# Altium PCB AfternoonCape_RevA1_TImux.PcbDoc
Units mil, origin at the board's own origin, x right, y up, seen from the top; angles counter-clockwise.
Board outline 3400 x 2150.01 mil, 2 copper layers (Top Layer, Bottom Layer); 32 components, 107 nets, 339 pads, 63 vias.
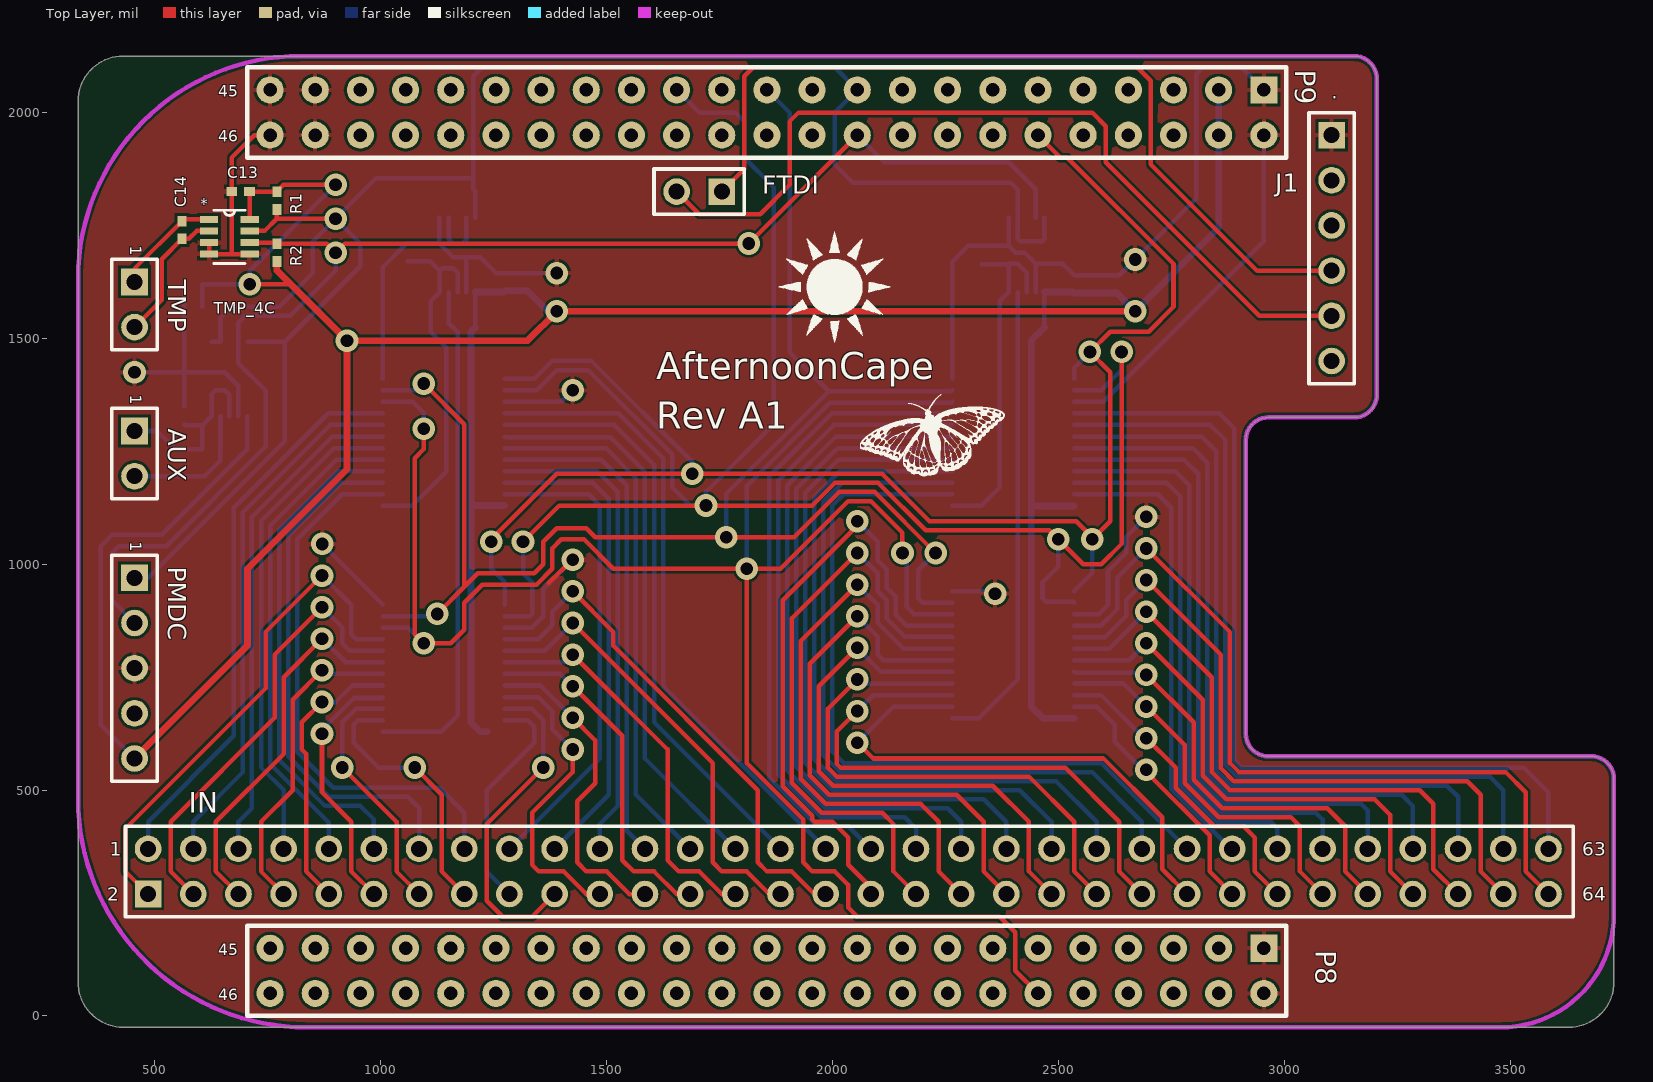
[diagram p0: Top Layer view]
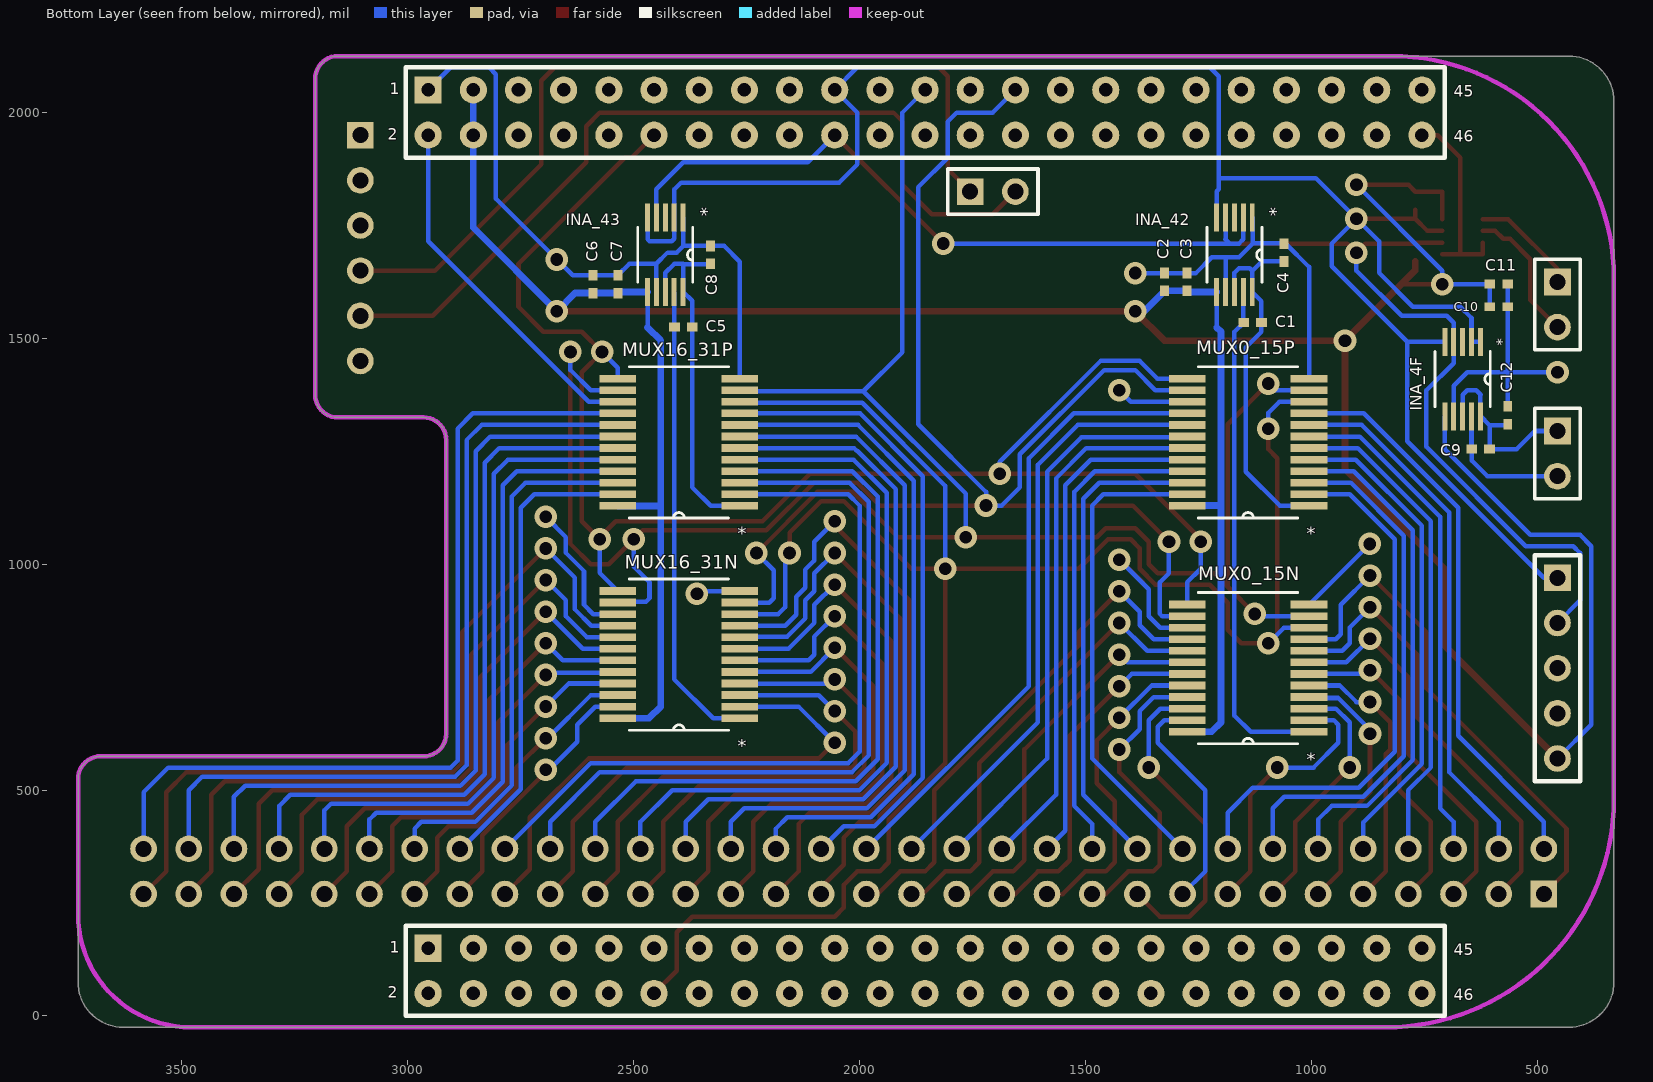
[diagram p1: Bottom Layer view, seen from below]

## Layer stack, top to bottom
Top Layer: signal copper 1.4
Dielectric: dielectric 12.6, FR-4, Dk 4.8
Bottom Layer: signal copper 1.4

## Board outline
3155,2125 3154.99,2125.01 822.5,2125.01 430,2125.01 ccw(c430,2025.01) 330,2025.01 330,480 330,75 ccw(c430,75) 430,-25 845,-25 3450,-25 3630,-25 ccw(c3630,75) 3730,75 3730,285 3730,525 ccw(c3680,525) 3680,575 2980,575 2965,575 cw(c2965,625) 2915,625 2915,1275 cw(c2965,1275) 2965,1325 2980,1325 3155,1325 ccw(c3155,1375) 3205,1375 3205,2075 ccw(c3155,2075) 3155,2125 3150,2125

## Design rules (kind name [scope] priority, off if disabled: settings)
Clearance [All] p1: gap=6
MinimumSolderMaskSliver [All] p1: minsoldermaskwidth=0
PolygonConnect [All] p1: connectstyle=Relief reliefconductorwidth=10 reliefentries=4 polygonreliefangle="90 Angle"
RoomDefinition AfternoonCape_RevA1_TImux [InComponentClass('AfternoonCape_RevA1_TImux')] p1: confinementstyle=ConfineIn formatcopy=TRUE lockcomponents=FALSE outline -70,-230 4170,-230 4170,2305 -70,2305
RoutingVias [All] p1: holewidth=28 width=50 viastyle="Through Hole" minholewidth=28 minwidth=50 maxholewidth=28 maxwidth=50
SilkscreenOverComponentPads [All] p1: minsilkscreentomaskgap=10
SolderMaskExpansion [All] p1: expansion=4
Width [All] p1: maxlimit=20 minlimit=10 preferedwidth=10
26 further rules are at their usual default settings.

## Components (designator, comment, footprint, x,y, rotation, side; value= is the part's Value field where it differs from the comment)
AUX "Header 2" HDR1X2 455,1295 r270 top
C1 "Cap Semi" 0402 1130,1535 r180 bottom
C2 "Cap Semi" 0402 1325,1625 r270 bottom
C3 "Cap Semi" 0402 1275,1625 r270 bottom
C4 "Cap Semi" 0402 1060,1690 r270 bottom
C5 "Cap Semi" 0402 2390,1525 r180 bottom
C6 "Cap Semi" 0402 2590,1620 r270 bottom
C7 "Cap Semi" 0402 2535,1620 r270 bottom
C8 "Cap Semi" 0402 2330,1685 r270 bottom
C9 "Cap Semi" 0402 625,1255 r180 bottom
C10 "Cap Semi" 0402 585,1570 r0 bottom
C11 "Cap Semi" 0402 585,1620 r0 bottom
C12 "Cap Semi" 0402 565,1330 r270 bottom
C13 "Cap Semi" 0402 690,1825 r0 top
C14 "Cap Semi" 0402 560,1740 r90 top
FTDI "Header 2" HDR1X2 1755,1825 r180 top
IN "Header 32x2" HDR2X32 485,270 r0 top
INA_4F "INA226" DGS10 665,1410 r270 bottom
INA_42 "INA226" DGS10 1170,1685 r270 bottom
INA_43 "INA226" DGS10 2430,1685 r270 bottom
J1 "Header 6" HDR1X6 3105,1950 r270 top
MUX0_15N "CD74HC4067_DB_24" DB24 1140,770 r0 bottom
MUX0_15P "CD74HC4067_DB_24" DB24 1140,1270 r0 bottom
MUX16_31N "CD74HC4067_DB_24" DB24 2400,800 r0 bottom
MUX16_31P "CD74HC4067_DB_24" DB24 2400,1270 r0 bottom
P8 "FEMALE HEADER 2x23" HEADER23X2 1855,100 r180 top
P9 "FEMALE HEADER 2x23" HEADER23X2 1855,2000 r180 top
PMDC "Header 5" HDR1X5 455,970 r270 top
R1 "Res3" 0402 770,1805 r90 top
R2 "Res3" 0402 770,1690 r270 top
TMP "Header 2" HDR1X2 455,1625 r270 top
TMP_4C "TMP441_DCN_8" DCN8-L 665,1725 r0 top

## Footprints (in the part's own frame and the unit in brackets; to place one, negate y for a bottom-side part, rotate by r counter-clockwise, add the part's x,y. Pads: shape width x height; smd on the part's side, far side on the other; paste and mask are expansions set on the pad)
0402 [mm] "Chip Capacitor, Body 1.0x0.5mm, IPC High Density"
  rect 0.6x0.5 smd: 1(-0.5,0) 2(0.5,0)
  body extent -0.55,-0.3 0.55,0.3, height 1.3
DB24 [mil]
  rect 81x17 smd: 1(-135,140.75) 2(-135,115.16) 3(-135,89.57) 4(-135,63.98) 5(-135,38.39) 6(-135,12.8) 7(-135,-12.8) 8(-135,-38.39) 9(-135,-63.98) 10(-135,-89.57) 11(-135,-115.16) 12(-135,-140.75) 13(135,-140.75) 14(135,-115.16) 15(135,-89.57) 16(135,-63.98) 17(135,-38.39) 18(135,-12.8) 19(135,12.8) 20(135,38.39) 21(135,63.98) 22(135,89.57) 23(135,115.16) 24(135,140.75)
  silkscreen extent -110,-168 110,168
DCN8-L [mil]
  rect 40x15 smd: 1(-45,38.39) 2(-45,12.8) 3(-45,-12.8) 4(-45,-38.39) 5(45,-38.39) 6(45,-12.8) 7(45,12.8) 8(45,38.39)
  silkscreen extent -34,-59 35,59
DGS10 [mil]
  rect 62x11 smd: 1(-82.5,39.37) 2(-82.5,19.68) 3(-82.5,0) 4(-82.5,-19.68) 5(-82.5,-39.37) 6(82.5,-39.37) 7(82.5,-19.68) 8(82.5,0) 9(82.5,19.68) 10(82.5,39.37)
  silkscreen extent -61,-61 61,61, body extent -96,-59 97,59, height 37
HDR1X2 [mm] "Connector; Header; 2 Position"
  rect 1.5x1.5 hole 0.9: 1(0,0)
  round 1.5 hole 0.9: 2(2.54,0)
  silkscreen extent -1.27,-1.27 3.81,1.27
HDR1X5 [mm] "Connector; Header; 5 Position"
  rect 1.5x1.5 hole 0.9: 1(0,0)
  round 1.5 hole 0.9: 2(2.54,0) 3(5.08,0) 4(7.62,0) 5(10.16,0)
  silkscreen extent -1.27,-1.27 11.43,1.27
HDR1X6 [mm] "Connector; Header; 6 Position"
  rect 1.5x1.5 hole 0.9: 1(0,0)
  round 1.5 hole 0.9: 2(2.54,0) 3(5.08,0) 4(7.62,0) 5(10.16,0) 6(12.7,0)
  silkscreen extent -1.27,-1.27 13.97,1.27
HDR2X32 [mm]
  rect 1.5x1.5 hole 0.9: 1(0,0)
  round 1.5 hole 0.9: 2(0,2.54) 3(2.54,0) 4(2.54,2.54) 5(5.08,0) 6(5.08,2.54) 7(7.62,0) 8(7.62,2.54) 9(10.16,0) 10(10.16,2.54) 11(12.7,0) 12(12.7,2.54) 13(15.24,0) 14(15.24,2.54) 15(17.78,0) 16(17.78,2.54) 17(20.32,0) 18(20.32,2.54) 19(22.86,0) 20(22.86,2.54) 21(25.4,0) 22(25.4,2.54) 23(27.94,0) 24(27.94,2.54) 25(30.48,0) 26(30.48,2.54) 27(33.02,0) 28(33.02,2.54) 29(35.56,0) 30(35.56,2.54) 31(38.1,0) 32(38.1,2.54) 33(40.64,0) 34(40.64,2.54) 35(43.18,0) 36(43.18,2.54) 37(45.72,0) 38(45.72,2.54) 39(48.26,0) 40(48.26,2.54) 41(50.8,0) 42(50.8,2.54) 43(53.34,0) 44(53.34,2.54) 45(55.88,0) 46(55.88,2.54) 47(58.42,0) 48(58.42,2.54) 49(60.96,0) 50(60.96,2.54) 51(63.5,0) 52(63.5,2.54) 53(66.04,0) 54(66.04,2.54) 55(68.58,0) 56(68.58,2.54) 57(71.12,0) 58(71.12,2.54) 59(73.66,0) 60(73.66,2.54) 61(76.2,0) 62(76.2,2.54) 63(78.74,0) 64(78.74,2.54)
  silkscreen extent -1.27,-1.27 80.14,3.81
HEADER23X2 [mil] "HEADER23X2"
  rect 60x60 hole 30 mask+2: 1(-1100,-50)
  round 60 hole 30 mask+2: 2(-1100,50) 3(-1000,-50) 4(-1000,50) 5(-900,-50) 6(-900,50) 7(-800,-50) 8(-800,50) 9(-700,-50) 10(-700,50) 11(-600,-50) 12(-600,50) 13(-500,-50) 14(-500,50) 15(-400,-50) 16(-400,50) 17(-300,-50) 18(-300,50) 19(-200,-50) 20(-200,50) 21(-100,-50) 22(-100,50) 23(0,-50) 24(0,50) 25(100,-50) 26(100,50) 27(200,-50) 28(200,50) 29(300,-50) 30(300,50) 31(400,-50) 32(400,50) 33(500,-50) 34(500,50) 35(600,-50) 36(600,50) 37(700,-50) 38(700,50) 39(800,-50) 40(800,50) 41(900,-50) 42(900,50) 43(1000,-50) 44(1000,50) 45(1100,-50) 46(1100,50)
  silkscreen extent -1150,-100 1150,100

## Part data
AUX FTDI TMP: "Header, 2-Pin"
C1 C2 C3 C4 C5 C6 C7 C8 C9 C10 C11 C12 C13 C14: "Capacitor (Semiconductor SIM Model)"
IN: "Header, 32-Pin, Dual row"
J1: "6-pin female header, long legs for FTDI-USB cable"
MUX0_15N MUX0_15P MUX16_31N MUX16_31P TMP_4C: "Imported"
P8 P9: library part HDR_46_F_2_0.1_0.1, "CONN HEADER FMAL 46PS.1\" DL GOLD"
PMDC: "Header, 5-Pin"
R1 R2: "Resistor"

## Via types
v1: diameter 50, hole 28, Top Layer to Bottom Layer, 63 vias

## Nets (pads, with @x,y where several pads share a name; then routed paths per layer and width w, separated by ;. In a path a pad name is that pad's centre, name@x,y a point inside that pad or via, vN(x,y) a via of type N, cw(c..) or ccw(c..) an arc to the next point about the centre after c; other vN are vias at no path point)
AIN0: P9.39
AIN1: P9.40
AIN2: P9.37
AIN3: P9.38
ALERT: PMDC.4
AUX_N: AUX.2 C9.1 INA_4F.9 | length 302.1
  Bottom Layer w10: AUX.2 610,1195 644.68,1229.68 C9.1 645.32,1255.63 INA_4F.9
AUX_P: AUX.1 C9.2 C12.2 INA_4F.8 INA_4F.10 | length 432.3
  Bottom Layer w10: AUX.1 505,1295 545,1255 C9.2 605.31,1308 ; C12.2 567.32,1308 605.31,1308 ; INA_4F.10@624.82,1327.5 605.31,1308 ; INA_4F.10 625.63,1374.37 625,1375 635,1385 655,1385 665,1375 INA_4F.8
B_UART0_RX: FTDI.1 J1.4 | length 1878.8
  Top Layer w10: FTDI.1 1805,1875 1805,2080 1825,2100 2675,2100 2705,2070 2705,1885 2940,1650 J1.4
B_UART0_TX: FTDI.2 J1.5 | length 1879.2
  Top Layer w10: FTDI.2 1705,1775 1840,1775 1905,1840 1905,1980 1925,2000 2575,2000 2605,1970 2605,1890 2945,1550 J1.5
CH0_N: IN.1 MUX0_15N.9 | length 1137.4
  Top Layer w10: IN.1 435,320 435,415 745,725 745,850 v1(870,975)
  Bottom Layer w10: v1(870,975) 935,910 935,845 946.02,833.98 MUX0_15N.9
CH0_P: IN.2 MUX0_15P.9 | length 1250.3
  Bottom Layer w10: IN.2 485,430 675,620 675,1125 883.98,1333.98 MUX0_15P.9
CH1_N: IN.3 MUX0_15N.8 | length 990
  Top Layer w10: IN.3 535,320 535,430 765,660 765,800 v1(870,905)
  Bottom Layer w10: v1(870,905) 915,860 915,825 931.61,808.39 MUX0_15N.8
CH1_P: IN.4 MUX0_15P.8 | length 1180.7
  Bottom Layer w10: IN.4 585,430 695,540 695,1115 888.39,1308.39 MUX0_15P.8
CH2_N: IN.5 MUX0_15N.7 | length 839.7
  Top Layer w10: IN.5 635,320 635,430 785,580 785,750 v1(870,835)
  Bottom Layer w10: v1(870,835) 922.2,782.8 MUX0_15N.7
CH2_P: IN.6 MUX0_15P.7 | length 1111.1
  Bottom Layer w10: IN.6 685,430 715,460 715,1105 892.8,1282.8 MUX0_15P.7
CH3_N: IN.7 MUX0_15N.6 | length 709.9
  Top Layer w10: IN.7 735,320 735,430 805,500 805,700 v1(870,765)
  Bottom Layer w10: v1(870,765) 877.8,757.2 MUX0_15N.6
CH3_P: IN.8 MUX0_15P.6 | length 1082.9
  Bottom Layer w10: IN.8 785,500.15 735,550.15 735,1095 897.2,1257.2 MUX0_15P.6
CH4_N: IN.9 MUX0_15N.5 | length 618.7
  Top Layer w10: v1(870,695) 825,650 825,590 835,580 835,320 IN.9
  Bottom Layer w10: v1(870,695) 900,695 936.61,731.61 MUX0_15N.5
CH4_P: IN.10 MUX0_15P.5 | length 1079.6
  Bottom Layer w10: IN.10 885,428.43 755,558.43 755,1085 901.61,1231.61 MUX0_15P.5
CH5_N: IN.11 MUX0_15N.4 | length 576
  Top Layer w10: v1(870,625) 870,495 935,430 935,320 IN.11
  Bottom Layer w10: v1(870,625) 870,633.28 940.65,703.93 1002.91,703.93 MUX0_15N.4
CH5_P: IN.12 MUX0_15P.4 | length 1122.1
  Bottom Layer w10: IN.12 985,435 955,465 876.72,465 775,566.72 775,1075 906.02,1206.02 MUX0_15P.4
CH6_N: IN.13 MUX0_15N.3 | length 553
  Top Layer w10: v1(915,550) 1035,430 1035,320 IN.13
  Bottom Layer w10: v1(915,550) 915,650 945.43,680.43 MUX0_15N.3
CH6_P: IN.14 MUX0_15P.3 | length 1174.4
  Bottom Layer w10: MUX0_15P.3 912.15,1180.43 795,1063.28 795,575 885,485 1060,485 1085,460 IN.14
CH7_N: IN.15 MUX0_15N.2 | length 592.4
  Top Layer w10: v1(1075,550) 1135,490 1135,320 IN.15
  Bottom Layer w10: MUX0_15N.2 949.84,654.84 940,645 940,605 995,550 v1(1075,550)
CH7_P: IN.16 MUX0_15P.2 | length 1207.3
  Bottom Layer w10: MUX0_15P.2 914.84,1154.84 815,1055 815,585 895,505 1130,505 1185,450 IN.16
CH8_N: IN.17 MUX0_15N.23 | length 505.4
  Bottom Layer w10: MUX0_15N.23 1325.16,654.84 1340,640 1340,605 1235,500 1235,320 IN.17
CH8_P: IN.18 MUX0_15P.23 | length 1063.1
  Bottom Layer w10: MUX0_15P.23 1460.16,1154.84 1485,1130 1485,570 IN.18
CH9_N: IN.19 MUX0_15N.22 | length 732.5
  Top Layer w10: v1(1360,550) 1235,425 1235,255 1270,220 1335,220 IN.19
  Bottom Layer w10: MUX0_15N.22 1334.57,680.43 1360,655 v1(1360,550)
CH9_P: IN.20 MUX0_15P.22 | length 1069.4
  Bottom Layer w10: MUX0_15P.22 1469.57,1180.43 1505,1145 1505,490 IN.20
CH10_N: IN.21 MUX0_15N.21 | length 690.7
  Top Layer w10: v1(1425,590) 1425,540 1335,450 1335,335 1350,320 1405,320 1455,270 IN.21
  Bottom Layer w10: MUX0_15N.21 1348.98,706.02 1380,675 1380,635 v1(1425,590)
CH10_P: IN.22 MUX0_15P.21 | length 1075.6
  Bottom Layer w10: MUX0_15P.21 1478.98,1206.02 1525,1160 1525,465 1485,425 IN.22
CH11_N: IN.23 MUX0_15N.20 | length 715.9
  Top Layer w10: v1(1425,660) 1475,610 1475,515 1435,475 1435,340 1455,320 1500,320 1550,270 IN.23
  Bottom Layer w10: MUX0_15N.20 1353.39,731.61 v1(1425,660)
CH11_P: IN.24 MUX0_15P.20 | length 1115
  Bottom Layer w10: MUX0_15P.20 1488.39,1231.61 1545,1175 1545,410 IN.24
CH12_N: IN.25 MUX0_15N.19 | length 772.9
  Top Layer w10: v1(1425,730) 1535,620 1535,345 1560,320 1605,320 1655,270 IN.25
  Bottom Layer w10: MUX0_15N.19 1397.8,757.2 v1(1425,730)
CH12_P: IN.26 MUX0_15P.19 | length 1187.5
  Bottom Layer w10: MUX0_15P.19 1497.8,1257.2 1565,1190 1565,490 IN.26
CH13_N: IN.27 MUX0_15N.18 | length 880.2
  Top Layer w10: v1(1425,800) 1635,590 1635,345 1660,320 1705,320 1755,270 IN.27
  Bottom Layer w10: MUX0_15N.18 1407.8,782.8 v1(1425,800)
CH13_P: IN.28 MUX0_15P.18 | length 1260.1
  Bottom Layer w10: MUX0_15P.18 1277.09,1280.7 1509.3,1280.7 1585,1205 1585,570 IN.28
CH14_N: IN.29 MUX0_15N.17 | length 1012.9
  Top Layer w10: v1(1425,870) 1735,560 1735,340 1755,320 1810,320 1860,270 IN.29
  Bottom Layer w10: MUX0_15N.17 1363.39,808.39 v1(1425,870)
CH14_P: IN.30 MUX0_15P.17 | length 1332.6
  Bottom Layer w10: MUX0_15P.17 1516.64,1308.36 1605,1220 1605,650 IN.30
CH15_N: IN.31 MUX0_15N.16 | length 1160.3
  Top Layer w10: v1(1425,940) 1515,850 1515,820 1835,500 1835,340 1855,320 1910,320 1960,270 IN.31
  Bottom Layer w10: MUX0_15N.16 1348.98,833.98 1380,865 1380,895 v1(1425,940)
CH15_P: IN.32 MUX0_15P.16 | length 1405.1
  Bottom Layer w10: MUX0_15P.16 1526.02,1333.98 1625,1235 1625,730 IN.32
CH16_N: IN.33 MUX16_31N.9 | length 1374.4
  Top Layer w10: v1(2055,1095) 2055,1085 1890,920 1890,508.28 1955,443.28 1955,435.29 1960.29,430 2000,430 2035,395 2035,335 2085,285 IN.33
  Bottom Layer w10: v1(2055,1095) 2100,1050 2100,1008.28 2120,988.28 2120,948.28 2140,928.28 2140,888.28 2164.31,863.98 MUX16_31N.9
CH16_P: IN.34 MUX16_31P.9 | length 1420.6
  Bottom Layer w10: IN.34 2035,420 1967.01,420 1860,527.01 1860,1195 1998.98,1333.98 MUX16_31P.9
CH17_N: IN.35 MUX16_31N.8 | length 1341.3
  Top Layer w10: v1(2055,1025) 1910,880 1910,516.57 1976.57,450 2110,450 2135,425 2135,320 IN.35
  Bottom Layer w10: v1(2055,1025) 2100,980 2100,940 2120,920 2120,880 2160,840 2263.39,840 MUX16_31N.8
CH17_P: IN.36 MUX16_31P.8 | length 1485.6
  Bottom Layer w10: IN.36 2185,415 2160,440 1975.29,440 1880,535.29 1880,1185 2003.39,1308.39 MUX16_31P.8
CH18_N: IN.37 MUX16_31N.7 | length 1299.3
  Top Layer w10: v1(2055,955) 1930,830 1930,524.85 1984.85,470 2195,470 2235,430 2235,320 IN.37
  Bottom Layer w10: v1(2055,955) 2100,910 2100,870 2157.2,812.8 MUX16_31N.7
CH18_P: IN.38 MUX16_31P.7 | length 1533.1
  Bottom Layer w10: MUX16_31P.7 2007.8,1282.8 1900,1175 1900,543.58 1983.58,460 2255,460 2285,430 IN.38
CH19_N: IN.39 MUX16_31N.6 | length 1277.7
  Top Layer w10: v1(2055,885) 1950,780 1950,533.14 1993.14,490 2275,490 2335,430 2335,320 IN.39
  Bottom Layer w10: v1(2055,885) 2100,840 2100,800 2112.8,787.2 MUX16_31N.6
CH19_P: IN.40 MUX16_31P.6 | length 1572.7
  Bottom Layer w10: MUX16_31P.6 2012.2,1257.2 2006.61,1251.61 2005.05,1251.61 1920,1166.57 1920,551.86 1991.86,480 2335,480 2385,430 IN.40
CH20_N: IN.41 MUX16_31N.5 | length 1232.8
  Top Layer w10: v1(2055,815) 1970,730 1970,541.42 2001.42,510 2355,510 2435,430 2435,320 IN.41
  Bottom Layer w10: v1(2055,815) 2108.39,761.61 MUX16_31N.5
CH20_P: IN.42 MUX16_31P.5 | length 1612.4
  Bottom Layer w10: MUX16_31P.5 2013.33,1231.61 1940,1158.28 1940,560.15 2000.15,500 2415,500 2485,430 IN.42
CH21_N: IN.43 MUX16_31N.4 | length 1212.1
  Top Layer w10: v1(2055,745) 1990,680 1990,549.71 2009.71,530 2435,530 2535,430 2535,320 IN.43
  Bottom Layer w10: v1(2055,745) 2065,735 2263.98,735 MUX16_31N.4
CH21_P: IN.44 MUX16_31P.4 | length 1652.1
  Bottom Layer w10: MUX16_31P.4 2016.02,1206.02 1960,1150 1960,568.43 2008.43,520 2495,520 2585,430 IN.44
CH22_N: IN.45 MUX16_31N.3 | length 1219.1
  Top Layer w10: v1(2055,675) 2010,630 2010,557.99 2017.99,550 2515,550 2635,430 2635,320 IN.45
  Bottom Layer w10: v1(2055,675) 2090,710 2264.57,710 MUX16_31N.3
CH22_P: IN.46 MUX16_31P.3 | length 1689.8
  Bottom Layer w10: MUX16_31P.3 2022.15,1180.43 1980,1138.28 1980,576.72 2016.72,540 2575,540 2685,430 IN.46
CH23_N: IN.47 MUX16_31N.2 | length 1179.3
  Top Layer w10: v1(2055,605) 2090,570 2600,570 2730,440 2730,325 IN.47
  Bottom Layer w10: v1(2055,605) 2135,685 2264.84,685 MUX16_31N.2
CH23_P: IN.48 MUX16_31P.2 | length 1694.3
  Bottom Layer w10: MUX16_31P.2 2024.84,1154.84 2000,1130 2000,585 2025,560 2595,560 IN.48
CH24_N: IN.49 MUX16_31N.23 | length 594.1
  Top Layer w10: v1(2695,545) 2695,540 2835,400 2835,320 IN.49
  Bottom Layer w10: MUX16_31N.23 2585.16,684.84 2625,645 2625,606.72 2686.72,545 v1(2695,545)
CH24_P: IN.50 MUX16_31P.23 | length 1040
  Bottom Layer w10: MUX16_31P.23 2720.16,1154.84 2750,1125 2750,502.01 2882.01,370 IN.50
CH25_N: IN.51 MUX16_31N.22 | length 702.7
  Top Layer w10: v1(2695,615) 2760,550 2760,505 2845,420 2910,420 2935,395 2935,320 IN.51
  Bottom Layer w10: MUX16_31N.22 2594.57,710.43 2690,615 v1(2695,615)
CH25_P: IN.52 MUX16_31P.22 | length 1186.8
  Bottom Layer w10: MUX16_31P.22 2739.57,1180.43 2770,1150 2770,510.29 2850.29,430 2970,430 2985,415 IN.52
CH26_N: IN.53 MUX16_31N.21 | length 851.4
  Top Layer w10: v1(2695,685) 2780,600 2780,515 2855,440 3015,440 3035,420 3035,320 IN.53
  Bottom Layer w10: MUX16_31N.21 2643.98,736.02 v1(2695,685)
CH26_P: IN.54 MUX16_31P.21 | length 1318.9
  Bottom Layer w10: MUX16_31P.21 2758.98,1206.02 2790,1175 2790,518.58 2858.58,450 3070,450 3085,435 IN.54
CH27_N: IN.55 MUX16_31N.20 | length 986.4
  Top Layer w10: v1(2695,755) 2800,650 2800,523.28 2863.28,460 3095,460 3135,420 3135,320 IN.55
  Bottom Layer w10: MUX16_31N.20 2537.09,759.52 2690.48,759.52 v1(2695,755)
CH27_P: IN.56 MUX16_31P.20 | length 1451
  Bottom Layer w10: MUX16_31P.20 2778.39,1231.61 2810,1200 2810,526.86 2866.86,470 3170,470 3185,455 IN.56
CH28_N: IN.57 MUX16_31N.19 | length 1167.4
  Top Layer w10: v1(2695,825) 2820,700 2820,531.57 2871.57,480 3200,480 3235,445 3235,320 IN.57
  Bottom Layer w10: MUX16_31N.19 2657.2,787.2 v1(2695,825)
CH28_P: IN.58 MUX16_31P.19 | length 1577.2
  Bottom Layer w10: MUX16_31P.19 2797.8,1257.2 2830,1225 2830,535.15 2875.15,490 3260,490 3285,465 IN.58
CH29_N: IN.59 MUX16_31N.18 | length 1350.9
  Top Layer w10: v1(2695,895) 2840,750 2840,540 2880,500 3300,500 3330,470 3330,325 IN.59
  Bottom Layer w10: MUX16_31N.18 2612.8,812.8 v1(2695,895)
CH29_P: IN.60 MUX16_31P.18 | length 1709.4
  Bottom Layer w10: MUX16_31P.18 2817.2,1282.8 2850,1250 2850,543.43 2883.43,510 3360,510 3385,485 IN.60
CH30_N: IN.61 MUX16_31N.17 | length 1557.9
  Top Layer w10: v1(2695,965) 2860,800 2860,548.28 2888.28,520 3405,520 3435,490 3435,320 IN.61
  Bottom Layer w10: MUX16_31N.17 2603.39,838.39 2650,885 2650,920 v1(2695,965)
CH30_P: IN.62 MUX16_31P.17 | length 1836.6
  Bottom Layer w10: MUX16_31P.17 2836.61,1308.39 2870,1275 2870,555 2895,530 3455,530 3485,500 IN.62
CH31_N: IN.63 MUX16_31N.16 | length 1751.1
  Top Layer w10: v1(2695,1035) 2880,850 2880,560 2900,540 3490,540 3535,495 3535,320 IN.63
  Bottom Layer w10: MUX16_31N.16 2593.98,863.98 2630,900 2630,970 v1(2695,1035)
CH31_P: IN.64 MUX16_31P.16 | length 1953.1
  Bottom Layer w10: MUX16_31P.16 2856.02,1333.98 2890,1300 2890,565 2905,550 3530,550 3585,495 IN.64
GND: C2.1 C3.1 C4.1 C6.1 C7.1 C8.1 C10.1 C11.1 C12.1 C13.1 INA_4F.7 INA_42.1 INA_42.7 INA_43.1 INA_43.7 J1.1 MUX0_15N.12 MUX0_15N.15 MUX0_15P.12 MUX0_15P.15 MUX16_31N.12 MUX16_31N.15 MUX16_31P.12 MUX16_31P.15 P8.1 P8.2 P9.1 P9.2 P9.43 P9.44 P9.45 P9.46 PMDC.3 TMP_4C.3 TMP_4C.4 TMP_4C.5 | length 5203.9
  Top Layer w10: TMP_4C.3 TMP_4C.4 670,1686.61 ; TMP_4C.5 670,1686.61 ; P9.46 720,1950 670.32,1900.32 C13.1 670.32,1686.93 670,1686.61 ; 1372.21,959.58 v1(1425,1010) ; v1(1389.68,1644.68) v1@1390,1645
  Bottom Layer w10: v1(455,1425) 565,1425 ; C12.1 565,1425 ; C11.1 C10.1 565.32,1425.32 565,1425 ; INA_4F.7 684.68,1395 654.68,1425 565,1425 ; v1(870.75,1045) MUX0_15N.12 ; MUX0_15P.12 1005,1658.18 1056.5,1709.68 C4.1 1060.5,1710.18 1129.82,1710.18 ; INA_42.1@1129.82,1767.5 1129.82,1710.18 ; INA_42.7 1189.68,1680 ; MUX0_15N.15 1334.57,859.57 1360,885 1360,945 v1(1425,1010) ; MUX0_15P.15 1399.57,1359.57 v1(1425,1385) ; v1(1389.68,1644.68) C2.1 C3.1 1255.32,1644.68 1220,1680 1189.68,1680 ; MUX16_31N.12 2354.25,940.75 v1(2360,935) ; MUX16_31P.12 2265,1670 2299.68,1704.68 C8.1 2390.32,1704.68 ; INA_43.1 2390.63,1705 2390.32,1704.68 ; INA_43.7 2449.68,1665.32 ; MUX16_31N.15 2589.57,889.57 2610,910 2610,985 2650,1025 2650,1060 v1(2695,1105) ; MUX16_31P.15 2599.57,1359.57 2955,1715 P9.2 ; P9.1 2905,2100 2820,2100 2805,2085 2805,1809.68 v1(2670,1674.68) 2635,1639.68 C6.1 C7.1 2509.37,1665.32 2449.68,1665.32 ; 1129.82,1710.18 1160,1680 1189.68,1680 ; 2390.32,1704.68 2405,1690 2425,1690 2449.68,1665.32
I2C2_SCL: INA_4F.1 INA_4F.2 INA_4F.5 INA_42.5 INA_43.2 INA_43.5 P9.19 PMDC.1 R1.1 TMP_4C.7 | length 4176.1
  Top Layer w10: TMP_4C.7 742.8,1737.8 770,1765 ; R1.1 770,1765 ; v1@899.68,1765.32 v1(900,1765) 770,1765
  Bottom Layer w10: PMDC.1 485,970 787.5,1272.5 787.5,1492.5 ; INA_4F.1 INA_4F.2 645.32,1545.32 670,1570 775,1570 850,1645 850,1715 v1(900,1765) ; INA_4F.5@705.18,1492.5 787.5,1492.5 ; INA_42.5 1209.37,1825.63 1205,1830 1205,1855 ; INA_43.5 2469.37,1719.37 2465,1715 2415.63,1715 2410.32,1720.31 INA_43.2 2410.32,1829.68 2395,1845 2045,1845 2005,1885 2005,2000 P9.19 2005,2100 1225,2100 1205,2080 1205,1855 ; 787.5,1492.5 955,1660 955,1710 v1(900,1765) ; v1(900,1765) 990,1855 1205,1855
I2C2_SDA: INA_4F.4 INA_42.2 INA_42.4 INA_43.4 P9.20 PMDC.2 R2.1 TMP_4C.6 | length 3963.5
  Top Layer w10: TMP_4C.6 767.48,1712.2 R2.1 880.32,1709.68 v1(900,1690) ; v1@899.68,1689.68 v1(900,1690) ; P9.20 v1(1815,1710) 920,1710 v1(900,1690)
  Bottom Layer w10: PMDC.2 405,920 405,1025 420,1040 525,1040 745,1260 745,1385 684.68,1445.32 INA_4F.4 684.68,1534.68 700,1550 800,1550 900,1650 v1(900,1690) ; INA_42.2 1150.32,1719.68 1160,1710 1180,1710 ; INA_42.4 1189.68,1720.32 1190,1720 1180,1710 ; v1(1815,1710) 1180,1710 ; P9.20 2115,1890 2390,1890 2449.68,1830.32 INA_43.4
LCD_DATA0: P8.45
LCD_DATA1: P8.46
LCD_DATA2: P8.43
LCD_DATA3: P8.44
LCD_DATA4: P8.41
LCD_DATA5: P8.42
LCD_DATA6: P8.39
LCD_DATA7: P8.40
LCD_DATA8: P8.37
LCD_DATA9: P8.38
LCD_DATA10: P8.36
LCD_DATA11: P8.34
LCD_DATA12: P8.35
LCD_DATA13: P8.33
LCD_DATA14: P8.31
LCD_DATA15: P8.32
LCD_HSYNC: P8.29
LCD_PCLK: P8.28
LCD_VSYNC: P8.27
MUX1_N: C1.1 INA_42.9 MUX0_15N.1 | length 1126
  Bottom Layer w10: MUX0_15N.1 1134.25,629.25 1170,665 1170,1514.69 C1.1 1150.32,1535.63 INA_42.9
MUX1_P: C1.2 C4.2 INA_42.8 INA_42.10 MUX0_15P.1 | length 806.2
  Bottom Layer w10: MUX0_15P.1 1069.25,1129.25 1145,1205 1145,1480 1110.31,1514.69 C1.2 1110.31,1582.18 INA_42.10 1130.63,1649.37 ; C4.2 1109.69,1670.31 1130.63,1649.37 ; INA_42.8 1170,1645 1160,1655 1136.26,1655 1130.63,1649.37
MUX2_N: C5.1 INA_43.9 MUX16_31N.1 | length 1038.4
  Bottom Layer w10: MUX16_31N.1 2324.25,659.25 2410,745 2410,1524.69 C5.1 2410.32,1525.63 INA_43.9
MUX2_P: C5.2 C8.2 INA_43.8 INA_43.10 MUX16_31P.1 | length 775.7
  Bottom Layer w10: MUX16_31P.1 2329.25,1129.25 2370,1170 2370,1524.69 C5.2 2370.31,1583 INA_43.10@2389.82,1602.5 ; C8.2@2330.63,1664.68 2390.63,1664.68 INA_43.10 ; 2390,1665.31 2409.69,1665.31 2430,1645 INA_43.8
MUX_SEL0: MUX0_15N.10 MUX0_15P.10 MUX16_31N.10 MUX16_31P.10 P8.12 | length 4477.8
  Top Layer w10: v1(1095,1300) 1095,1255 1075,1235 1075,845 v1(1095,825) 1155,825 1185,855 1185,915 1225,955 1345,955 1380,990 1380,1035 1400,1055 1450,1055 1515,990 v1(1810,990) ; v1(2155,1025) 2155,1070 2085,1140 2035,1140 1885,990 v1(1810,990) ; P8.12 2405,100 2405,185 2370,220 2055,220 2035,240 2035,290 2005,320 1955,320 1935,340 1935,435 1810,560 v1(1810,990)
  Bottom Layer w10: MUX0_15N.10 1060.43,859.57 v1(1095,825) ; MUX0_15P.10 1070.43,1359.57 1095,1335 v1(1095,1300) ; v1(1810,990) 1810,1173.28 1994.19,1357.48 2262.91,1357.48 MUX16_31P.10 ; v1(2155,1025) 2165,1015 2165,905 2180.43,889.57 MUX16_31N.10
MUX_SEL1: MUX0_15N.11 MUX0_15P.11 MUX16_31N.11 MUX16_31P.11 P9.23 | length 3632
  Top Layer w10: v1(1095,1400) 1185,1310 1185,950 ; v1(1125,890) 1185,950 ; v1(2228.28,1025) 2093.28,1160 2015,1160 1915,1060 v1(1765,1060) 1475,1060 1455,1080 1390,1080 1360,1050 1360,1000 1340,980 1215,980 1185,950
  Bottom Layer w10: MUX0_15N.11 1120.16,885.16 v1(1125,890) ; MUX0_15P.11 1080.16,1385.16 v1(1095,1400) ; v1(1765,1060) 1765,1156.57 1991.5,1383.07 ; P9.23 1905,2000 1905,1469.57 1991.5,1383.07 ; v1(2228.28,1025) 2190,986.72 2190,925 2199.84,915.16 MUX16_31N.11 ; MUX16_31P.11 2262.91,1383.07 1991.5,1383.07
MUX_SEL2: MUX0_15N.14 MUX0_15P.14 MUX16_31N.14 MUX16_31P.14 P9.27 | length 4258.3
  Top Layer w10: v1(1315,1050) 1395,1130 v1(1720,1130) 1955,1130 2005,1180 2101.57,1180 2206.57,1075 2480,1075 v1(2500,1055) 2555,1000 2595,1000 2640,1045 v1(2640,1470)
  Bottom Layer w10: MUX0_15N.14 1330.16,885.16 1335,890 1335,960 1315,980 v1(1315,1050) ; MUX0_15P.14 1345.16,1385.16 1390,1430 1458.28,1430 1645,1243.28 1645,1170 1685,1130 v1(1720,1130) 1720,1160 1870,1310 1870,1835 1805,1900 1805,1980 1785,2000 1705,2000 P9.27 ; v1(2500,1055) 2500,995 2465,960 2465,925 2472.75,917.25 2532.91,917.25 MUX16_31N.14 ; MUX16_31P.14 2595.16,1385.16 2640,1430 v1(2640,1470)
MUX_SEL3: MUX0_15N.13 MUX0_15P.13 MUX16_31N.13 MUX16_31P.13 P9.12 | length 3569.4
  Top Layer w10: v1(1245,1050) 1245,1055 1390,1200 v1(1690,1200) 2109.85,1200 2214.85,1095 2540,1095 2575,1060 v1(2575,1055) 2615,1095 2615,1425 v1(2570,1470) 2615,1515 2700,1515 2755,1570 2755,1665 2520,1900 2505,1900 P9.12 P9.12@2470,1950
  Bottom Layer w10: v1(1245,1050) 1245,990 1275,960 MUX0_15N.13 ; MUX0_15P.13 1340.59,1410.75 1379.84,1450 1466.57,1450 1690,1226.57 v1(1690,1200) ; MUX16_31N.13 2575,980.75 v1(2575,1055) ; MUX16_31P.13 2535,1435 v1(2570,1470)
PADN: C14.1 TMP.2 TMP_4C.2 | length 306
  Top Layer w10: TMP.2 515,1585 515,1675.32 C14.1 575.32,1720.32 592.8,1737.8 TMP_4C.2
PADP: C14.2 TMP.1 TMP_4C.1 | length 239.7
  Top Layer w10: TMP.1 455,1654.69 C14.2 563.7,1763.39 TMP_4C.1
SYS_RESETN: P9.10
V3_3D: C2.2 C3.2 C6.2 C7.2 C10.2 C11.2 C13.2 INA_4F.6 INA_42.6 INA_43.6 MUX0_15N.24 MUX0_15P.24 MUX16_31N.24 MUX16_31P.24 P9.3 P9.4 PMDC.5 R1.2 R2.2 TMP_4C.8 | length 8113.1
  Top Layer w10: TMP_4C.8@709.69,1763.7 TMP_4C.8 710,1824.69 C13.2 R1.2@769.68,1825 ; v1(710,1620) 799.69,1620 800,1620.31 ; R1.2 R1.2@769.68,1825 ; v1(900,1840) 784.68,1840 R1.2@769.68,1825
  Top Layer w15: PMDC.5 705,820 705,990 925.31,1210.31 v1(925.31,1495) ; R2.2 770,1650.31 800,1620.31 v1(925.31,1495) ; v1(2670,1560) v1(1390,1560) 1325,1495 v1(925.31,1495)
  Bottom Layer w10: PMDC.5 380,645 380,1040 405,1065 515,1065 704.37,1254.37 INA_4F.6 ; C10.2 C11.2 v1(710,1620) 710,1650 v1(900,1840) ; 1209.37,1524.37 INA_42.6 ; C3.2@1272.18,1602.5 C3.2 ; MUX0_15P.24@1274.25,1130 MUX0_15P.24 ; v1@1370.31,1560 v1(1390,1560) ; 2440,1130 2440.75,1129.25 ; 2469.37,1524.37 INA_43.6 ; C7.2@2532.81,1602.5 C7.2
  Bottom Layer w15: 1209.37,1524.37 1200,1515 1200,1130 ; INA_42.6 C3.2@1272.18,1602.5 ; MUX0_15N.24@1235,629.25 1220.75,629.25 1200,650 1200,1130 ; MUX0_15P.24@1274.25,1130 1200,1130 ; C3.2 C2.2 v1@1370.31,1560 ; 2440.75,1129.25 MUX16_31P.24 ; 2469.37,1524.37 2440,1495 2440,1130 2440,685 2465.75,659.25 MUX16_31N.24 ; INA_43.6 C7.2@2532.81,1602.5 ; C7.2 C6.2 2629.68,1600.32 v1(2670,1560) 2855,1745 P9.4 P9.3
pads on no net: INA_4F.3 INA_42.3 INA_43.3 J1.2 J1.3 J1.6 P8.3 P8.4 P8.5 P8.6 P8.7 P8.8 P8.9 P8.10 P8.11 P8.13 P8.14 P8.15 P8.16 P8.17 P8.18 P8.19 P8.20 P8.21 P8.22 P8.23 P8.24 P8.25 P8.26 P8.30 P9.5 P9.6 P9.7 P9.8 P9.9 P9.11 P9.13 P9.14 P9.15 P9.16 P9.17 P9.18 P9.21 P9.22 P9.24 P9.25 P9.26 P9.28 P9.29 P9.30 P9.31 P9.32 P9.33 P9.34 P9.35 P9.36 P9.41 P9.42

## Polygon pours and split planes (outlines as drawn)
GND on Top Layer "Top Overlay-No Net" (solid, pour order 5): 3150,2125 cw(c3150,2070) 3205,2070 3205,1375 cw(c3155,1375) 3155,1325 3150,1325 2975,1325 2965,1325 ccw(c2965,1275) 2915,1275 2915,625 ccw(c2965,625) 2965,575 2970,575 3655,575 3680,575 cw(c3680,525) 3730,525 3730,225 3715,145 3685,80 3625,20 3545,-20 3445,-25 835,-25 685,-5 535,70 430,175 355,310 330,445 330,685 330,1635 345,1760 390,1875 470,1980 585,2065 700,2110 795,2125 865,2125 3150,2125

## Keep-outs
Keep-Out Layer:
  lines w10: 329.99,1632.5 cw(c822.5,1632.5) 822.5,2125.01 ; 330,1635 330,480 ccw(c835,480) 835,-25 3480,-25 ccw(c3480,225) 3730,225 3730,525 ccw(c3680,525) 3680,575 3620,575 2970,575 2965,575 cw(c2965,625) 2915,625 2915,645 2915,1260 2915,1275 cw(c2965,1275) 2965,1325 2995,1325 3145,1325 3155,1325 ccw(c3155,1375) 3205,1375 3205,1405 3205,1525 3205,2000 3205,2075 ccw(c3155,2075) 3155,2125 3080,2125 825,2125

## Silkscreen, mask and mechanical layers (free items; w line width, h text height)
Top Overlay:
  drawing of 16 lines, arcs and shapes, not listed
  text "." at 3105,2030 h30
  text "1" at 445,1705 h25 r270
  text "AfternoonCape" at 1610,1410 h60
  text "1" at 445,1375 h25 r270
  text "Rev A1" at 1610,1300 h60
  text "1" at 445,1050 h25 r270

## Text inside footprints (layer, text, board x,y; h text height)
IN: Top Overlay "2" at 395,255 h30; Top Overlay "1" at 400,355 h30; Top Overlay "64" at 3660,255 h30; Top Overlay "63" at 3660,355 h30
INA_4F: Bottom Overlay "*" at 600,1500 h25 r90
INA_42: Bottom Overlay "*" at 1105,1790 h30 r90
INA_43: Bottom Overlay "*" at 2365,1790 h30 r90
MUX0_15N: Bottom Overlay "*" at 990,595 h30 r180
MUX0_15P: Bottom Overlay "*" at 990,1095 h30 r180
MUX16_31N: Bottom Overlay "*" at 2250,625 h30 r180
MUX16_31P: Bottom Overlay "*" at 2250,1095 h30 r180
P8: Top Overlay "45" at 640,135 h25; Top Overlay "46" at 640,35 h25; Bottom Overlay "1" at 3040,140 h25; Bottom Overlay "2" at 3045,40 h25; Bottom Overlay "46" at 685,35 h25; Bottom Overlay "45" at 685,135 h25
P9: Top Overlay "46" at 640,1935 h25; Top Overlay "45" at 640,2035 h25; Bottom Overlay "45" at 685,2035 h25; Bottom Overlay "46" at 685,1935 h25; Bottom Overlay "2" at 3045,1940 h25; Bottom Overlay "1" at 3040,2040 h25
TMP_4C: Top Overlay "*" at 600,1785 h25